# EAGLE board Initial layout (EAGLE 8.5.0)
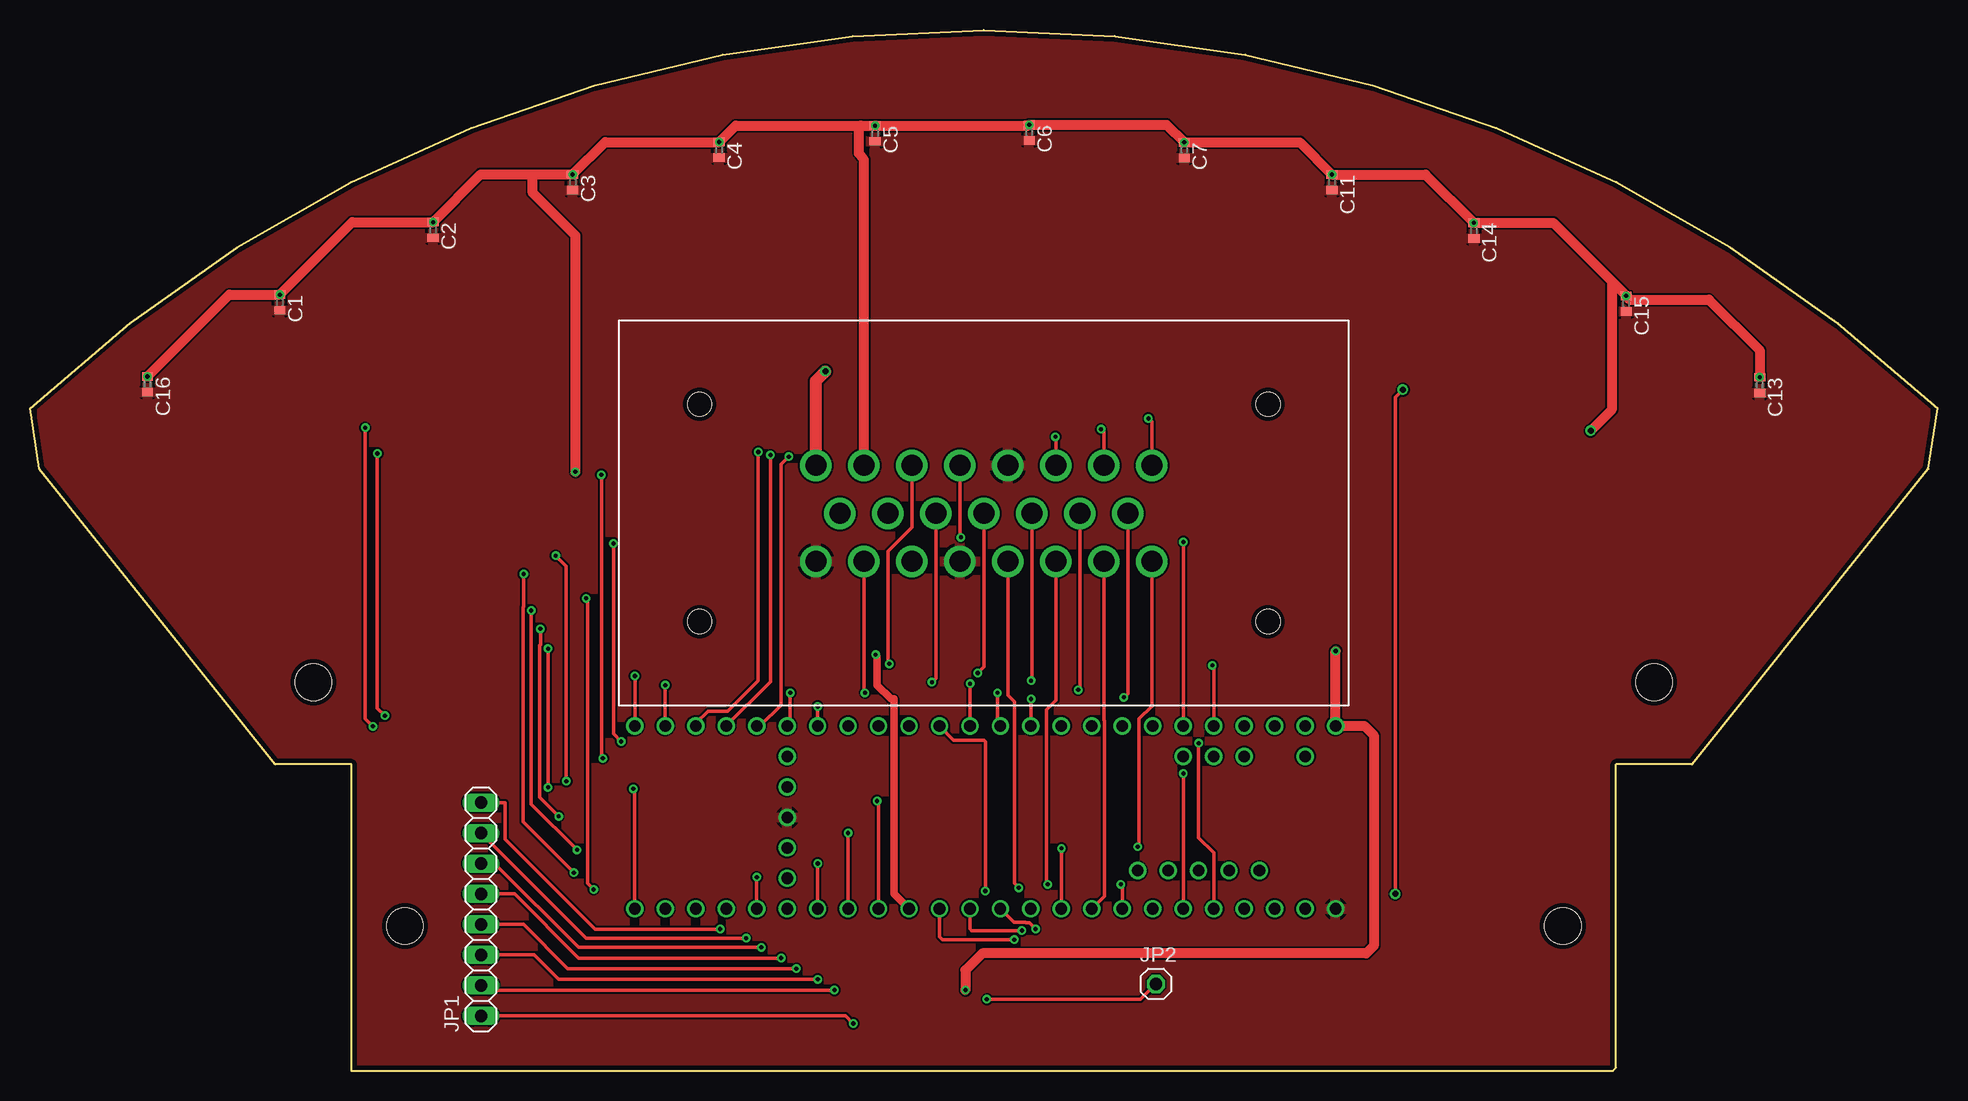
[diagram p0: board, top side]
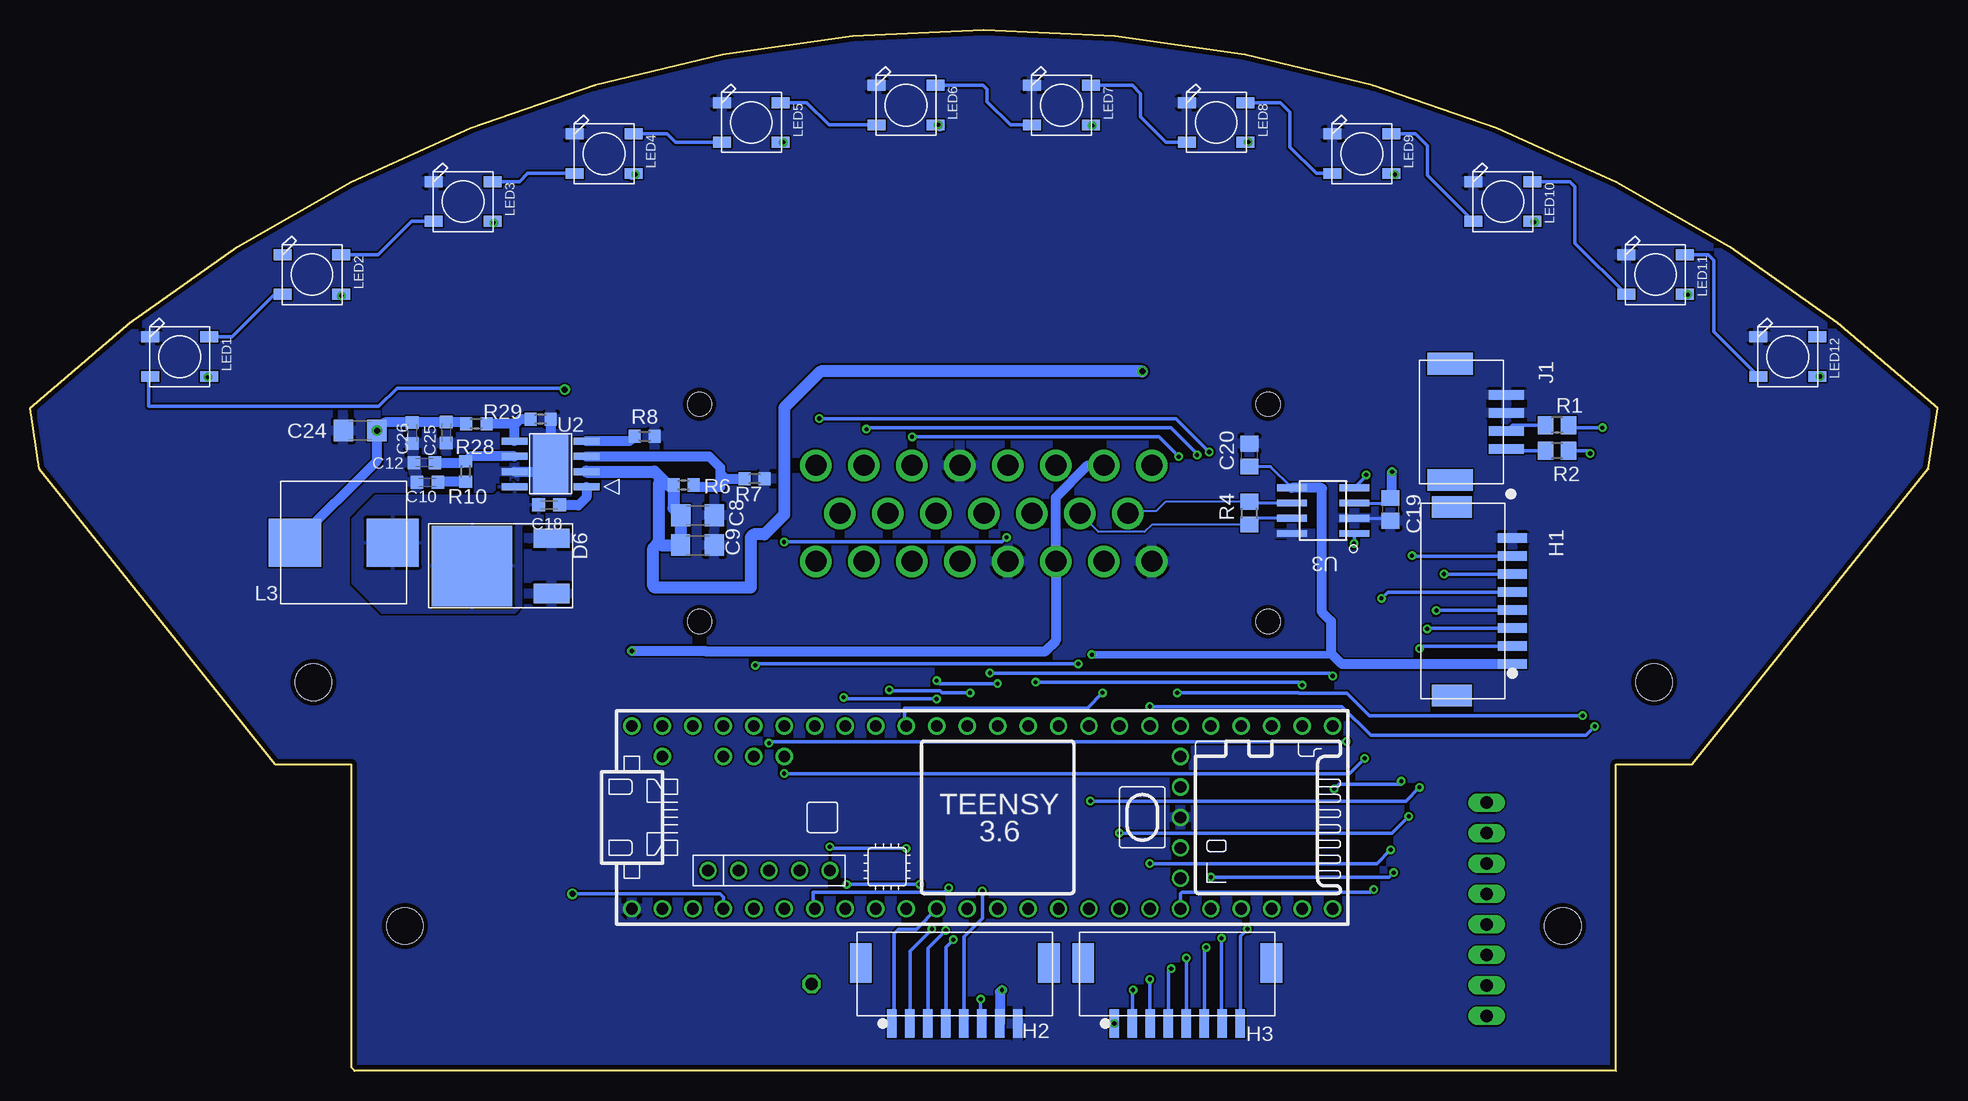
[diagram p1: board, bottom side, seen from below]

Size 159 x 86.73 mm. Coordinates in mm from the lower left corner, seen from the top.
Outline: 26.8,0 26.8,25.53 20.45,25.53 0.76,50.16 0,55.19 arc-87 159,55.19 158.24,50.16 138.56,25.53 132.21,25.53 132.21,0.25 131.95,0 26.8,0
Copper layers (1*16): Top 0.0356mm / dielectric 1.5011mm / Bottom 0.0356mm
Design rules "OSH_PCB Rules": minimum track width 6mil, minimum drill 13mil, track to track 6mil, track to pad 6mil, pad to pad 6mil, via to via 6mil, smd to smd 6mil, copper to edge 15mil, drill to drill 6mil, minimum pad ring 7mil, minimum via ring 7mil, stop-mask expansion 3mil, vias tented up to drill 0mil, thermal gap 10mil
Holes 3.05 mm at 127.76,12.07 31.24,12.07 23.62,32.39 135.38,32.39

## Footprints (pad centres in the part's own frame; a part is rotated, then mirrored left to right if it is on the bottom)
C0402 = smd 0.7 x 0.9: 1 -0.65,0; 2 0.65,0
C1206 = smd 1.6 x 1.8: 1 -1.4,0; 2 1.4,0
C0603K = smd 1.05 x 1.08: 1 -0.875,0; 2 0.875,0
C0805 = smd 1.3 x 1.5: 1 -0.95,0; 2 0.95,0
DPAK = smd 3 x 1.6: 1 4.25,-2.3; 3 4.25,2.3 | smd 6.7 x 6.7: 2 -2.4,0
MOLEX-CLIKMATE-8-VERTICAL-HEADER = smd 0.8 x 2.4: 1 5.25,4.064; 2 3.75,4.064; 3 2.25,4.064; 4 0.75,4.064; 5 -0.75,4.064; 6 -2.25,4.064; 7 -3.75,4.064; 8 -5.25,4.064 | smd 1.8 x 3.3: M1 7.85,-0.986; M2 -7.85,-0.986
MOLEX-CLIKMATE-4-R/A = smd 0.8 x 2.9: 1 2.25,3.7; 2 0.75,3.7; 3 -0.75,3.7; 4 -2.25,3.7 | smd 1.8 x 3.8: M1 4.85,-1; M2 -4.85,-1
1X08 = drill 1.016 long: 1 -8.89,0; 2 -6.35,0; 3 -3.81,0; 4 -1.27,0; 5 1.27,0; 6 3.81,0; 7 6.35,0; 8 8.89,0
1X01 = drill 1.016 octagon: 1 0,0
WURTH-744325XXXX = smd 4.35 x 4: P$1 -4.075,0; P$2 4.075,0
WS2812B = smd 1.5 x 0.9: 1-VDD 2.45,-1.65; 2-DOUT 2.45,1.65; 3-GND -2.45,1.65; 4-DIN -2.45,-1.65
R0805 = smd 1.3 x 1.5: 1 -0.95,0; 2 0.95,0
R0603 = smd 1 x 1.1: 1 -0.85,0; 2 0.85,0
TPS54540 = smd 0.6 x 2.15: 1 -1.905,-3; 2 -0.635,-3; 3 0.635,-3; 4 1.905,-3; 5 1.905,3; 6 0.635,3; 7 -0.635,3; 8 -1.905,3 | smd 3.1 x 2.4: PAD 0,0 | smd 4.9 x 2.95: PAD1 0,0
SOIC8-N_MC = smd 2.5 x 0.559: 1 -2.6,1.905; 2 -2.6,0.635; 3 -2.6,-0.635; 4 -2.6,-1.905; 5 2.6,-1.905; 6 2.6,-0.635; 7 2.6,0.635; 8 2.6,1.905
776200-1 = drill 1.75: P$1 14,-3.96; P$2 10,-3.96; P$3 6,-3.96; P$4 2,-3.96; P$5 -2,-3.96; P$6 -6,-3.96; P$7 -10,-3.96; P$8 -14,-3.96; P$9 12,0.04; P$10 8,0.04; P$11 4,0.04; P$12 0,0.04; P$13 -4,0.04; P$14 -8,0.04; P$15 -12,0.04; P$16 14,4.04; P$17 10,4.04; P$18 6,4.04; P$19 2,4.04; P$20 -2,4.04; P$21 -6,4.04; P$22 -10,4.04; P$23 -14,4.04 | hole 2: -23.7,9.05; -23.7,-9.05; 23.7,9.05; 23.7,-9.05
TEENSY_3.5/3.6 = drill 0.965: 0/RX -25.4,-7.62; 1/TX -22.86,-7.62; 2 -20.32,-7.62; 3/CANTX -17.78,-7.62; 3V3 7.62,-7.62; 3V3_2 17.78,-2.54; 3V3_LO -22.86,7.62; 4/CANRX -15.24,-7.62; 5 -12.7,-7.62; 6 -10.16,-7.62; 7 -7.62,-7.62; 8 -5.08,-7.62; 9/CS -2.54,-7.62; 10/CS 0,-7.62; 11/MOSI 2.54,-7.62; 12/MISO 5.08,-7.62; 13/SCK 5.08,7.62; 14/A0 2.54,7.62; 15/A1 0,7.62; 16/A2 -2.54,7.62; 17/A3 -5.08,7.62; 18/A4/SDA -7.62,7.62; 19/A5/SCL -10.16,7.62; 20/A6 -12.7,7.62; 21/A7 -15.24,7.62; 21/DAC0 12.7,7.62; 22/A8 -17.78,7.62; 23/A9 -20.32,7.62; 24 10.16,-7.62; 25 12.7,-7.62; 26 15.24,-7.62; 27 17.78,-7.62; 28 20.32,-7.62; 29 22.86,-7.62; 30 25.4,-7.62; 31/A12 27.94,-7.62; 32/A13 30.48,-7.62; 33/A14 30.48,7.62; 34/A15 27.94,7.62; 35/A16 25.4,7.62; 36/A17 22.86,7.62; 37/A18 20.32,7.62; 38/A19 17.78,7.62; 39/A20 15.24,7.62; A10 -17.78,5.08; A11 -15.24,5.08; A22/DAC1 10.16,7.62; AGND -25.4,7.62; AREF -20.32,5.08; GND -27.94,-7.62; GND2 7.62,7.62; GND3 17.78,0; PROG 17.78,2.54; RESET 17.78,5.08; U5V -21.59,-4.445; UD+ -16.51,-4.445; UD- -19.05,-4.445; UGND1 -13.97,-4.445; UGND2 -11.43,-4.445; VBAT 17.78,-5.08; VIN -27.94,7.62; VUSB -25.4,5.08

## Placement (x,y rotation side)
C1  [C0402]  20.83,64.02 270 top
C2  [C0402]  33.6,70.07 270 top
C3  [C0402]  45.24,74.04 270 top
C4  [C0402]  57.45,76.74 270 top
C5  [C0402]  70.45,78.11 270 top
C6  [C0402]  83.29,78.18 270 top
C7  [C0402]  96.21,76.72 270 top
C8  4.7uF 50v  [C1206]  103.36,46.29 0 bottom
C9  4.7uF 50v  [C1206]  103.37,43.8 0 bottom
C10  0.012uF  [C0603K]  125.88,49.03 180 bottom
C11  [C0402]  108.53,74.04 270 top
C12  9pF  [C0603K]  126.13,50.68 180 bottom
C13  [C0402]  144.18,57.15 270 top
C14  [C0402]  120.35,70.01 270 top
C15  [C0402]  133.05,63.93 270 top
C16  [C0402]  9.8,57.21 270 top
C18  0.1uF  [C0603K]  115.74,47.15 180 bottom
C19  .1uF  [C0805]  45.6,46.79 270 bottom
C20  .1uF  [C0805]  57.36,51.31 90 bottom
C24  47uF  [C1206]  131.48,53.35 180 bottom
C25  10uF  [C0603K]  124.31,53.17 270 bottom
C26  10uF  [C0603K]  127.13,53.16 270 bottom
D6  50WQ10FNPBF  [DPAK]  119.76,42.07 0 bottom
H1  5025840870  [MOLEX-CLIKMATE-8-VERTICAL-HEADER]  39.5,39.14 270 bottom
H2  5025840870  [MOLEX-CLIKMATE-8-VERTICAL-HEADER]  81.91,8 180 bottom
H3  5025840870  [MOLEX-CLIKMATE-8-VERTICAL-HEADER]  63.37,8 180 bottom
J1  502585-0470  [MOLEX-CLIKMATE-4-R/A]  39.63,54.07 270 bottom
JP1  [1X08]  37.59,13.46 90 top
JP2  [1X01]  93.85,7.24 0 top
L3  10uH  [WURTH-744325XXXX]  132.85,44.02 180 bottom
LED1  WS2812B5050  [WS2812B]  146.52,59.51 0 bottom
LED2  WS2812B5050  [WS2812B]  135.5,66.35 0 bottom
LED3  WS2812B5050  [WS2812B]  122.9,72.44 0 bottom
LED4  WS2812B5050  [WS2812B]  111.15,76.42 0 bottom
LED5  WS2812B5050  [WS2812B]  98.88,79.03 0 bottom
LED6  WS2812B5050  [WS2812B]  85.99,80.46 0 bottom
LED7  WS2812B5050  [WS2812B]  73.02,80.46 0 bottom
LED8  WS2812B5050  [WS2812B]  60.13,79.03 0 bottom
LED9  WS2812B5050  [WS2812B]  47.98,76.42 0 bottom
LED10  WS2812B5050  [WS2812B]  36.23,72.44 0 bottom
LED11  WS2812B5050  [WS2812B]  23.51,66.35 0 bottom
LED12  WS2812B5050  [WS2812B]  12.49,59.51 0 bottom
R1  100  [R0805]  31.71,53.81 180 bottom
R2  100  [R0805]  31.71,51.66 180 bottom
R4  120  [R0805]  57.36,46.47 90 bottom
R6  DNP  [R0603]  104.52,48.81 180 bottom
R7  DNP  [R0603]  98.61,49.35 180 bottom
R8  162k  [R0603]  107.77,52.87 180 bottom
R10  15k  [R0603]  122.69,49.95 90 bottom
R28  60.4k  [R0603]  121.81,53.92 180 bottom
R29  11.5k  [R0603]  116.44,54.3 180 bottom
U2  TPS54540DDARQ1  [TPS54540]  115.61,50.57 90 bottom
U3  [SOIC8-N_MC]  51.23,46.68 180 bottom
U$1  TE-776200-1  [776200-1]  79.5,46.48 180 top
U$2  TEENSY_3.5/3.6  [TEENSY_3.5/3.6]  80.89,21.12 0 bottom

## Library data of the parts
C1-C7 C11 C13-C16 C19 C20 R1 R2 R4 = rcl
C8 C9 = rcl; PARTNO: GRM31CR71H475KA12L
C10 = rcl; PARTNO: GRM188R71H123KA01D
C12 = rcl; PARTNO: GRM1885C1H9R0DA01D
C18 = rcl; PARTNO: GRM188R71E104KA01D
C24 = rcl; PARTNO: GRM31CR61A476ME15L
C25 C26 = rcl; PARTNO: GRM188R61A106KE69D
D6 = FormE; PARTNO: VS-50WQ10FNPBF
H1-H3 J1 U3 U$1 = FormE
JP1 JP2 = pinhead
L3 = FormE; PARTNO: 7443251000
LED1-LED12 = adafruit
R6 R7 = rcl; PARTNO: *
R8 = rcl; PARTNO: ERJ-3EKF1623V
R10 = rcl; PARTNO: ERJ-3EKF1502V
R28 = rcl; PARTNO: ERJ-3EKF6042V
R29 = rcl; PARTNO: ERJ-3EKF1152V
U2 = FormE; PARTNO: TPS54540DDAR
U$2 = Teensy356

## Nets
5VREG_EN: R6.1 R7.2 U2.3
+3V3: C20.1 H1.1 U3.5 U$2.3V3
+5V: C1.1 C2.1 C3.1 C4.1 C5.1 C6.1 C7.1 C11.1 C13.1 C14.1 C15.1 C16.1 C19.1 C24.1 C25.1 C26.1 H2.7 L3.P$2 LED1.1-VDD LED2.1-VDD LED3.1-VDD LED4.1-VDD LED5.1-VDD LED6.1-VDD LED7.1-VDD LED8.1-VDD LED9.1-VDD LED10.1-VDD LED11.1-VDD LED12.1-VDD R28.2 U3.3 U$1.P$2 U$1.P$18 U$2.VIN
+15V: C8.1 C9.1 R6.2 U2.2 U$1.P$1
AMS: U$1.P$20 U$2.5
BOOT_5V: C18.1 U2.1
BSPD: U$1.P$22 U$2.7
CAN_N: R4.2 U3.6 U$1.P$9
CAN_P: R4.1 U3.7 U$1.P$10
CAN_RX: U3.4 U$2.4/CANRX
CAN_TX: U3.1 U$2.3/CANTX
CLK: H2.5 U$2.13/SCK
COMP_5V: C12.1 R10.2 U2.6
CS: H2.2 U$2.10/CS
D/C: H2.1 U$2.9/CS
DI1: LED1.4-DIN U$2.2
DI2: U$1.P$4 U$2.21/A7
DOWN: H1.3 U$2.25
DRS_FLAP: H1.6 U$2.28
FB_5V: R28.1 R29.2 U2.5
GND: C1.2 C2.2 C3.2 C4.2 C5.2 C6.2 C7.2 C8.2 C9.2 C10.2 C11.2 C12.2 C13.2 C14.2 C15.2 C16.2 C19.2 C20.2 C24.2 C25.2 C26.2 D6.1 D6.3 H1.8 H2.8 J1.3 J1.4 LED1.3-GND LED3.3-GND LED4.3-GND LED5.3-GND LED6.3-GND LED7.3-GND LED8.3-GND LED9.3-GND LED10.3-GND LED11.3-GND LED12.3-GND R7.1 R8.1 R29.1 U2.7 U2.PAD U2.PAD1 U3.2 U3.8 U$1.P$5 U$1.P$16 U$1.P$19 U$2.GND U$2.GND3
IMD: U$1.P$21 U$2.6
LEFT: H1.4 U$2.26
MISO: H2.4 U$2.12/MISO
MOSI: H2.3 U$2.11/MOSI
N$1: LED2.3-GND
N$2: LED1.2-DOUT LED2.4-DIN
N$3: H3.1 JP1.1
N$4: LED2.2-DOUT LED3.4-DIN
N$5: LED3.2-DOUT LED4.4-DIN
N$6: LED4.2-DOUT LED5.4-DIN
N$7: LED5.2-DOUT LED6.4-DIN
N$8: LED6.2-DOUT LED7.4-DIN
N$13: H3.2 JP1.2
N$15: H3.3 JP1.3
N$16: H3.4 JP1.4
N$17: H3.5 JP1.5
N$18: H3.6 JP1.6
N$19: H3.7 JP1.7
N$26: H3.8 JP1.8
N$27: H2.6 JP2.1
N$29: C10.1 R10.1
N$34: J1.1 R2.2
N$35: J1.2 R1.2
N$36: LED7.2-DOUT LED8.4-DIN
N$37: LED8.2-DOUT LED9.4-DIN
N$38: LED9.2-DOUT LED10.4-DIN
N$39: LED10.2-DOUT LED11.4-DIN
N$40: LED11.2-DOUT LED12.4-DIN
PADDLE: H1.7 U$2.32/A13
RIGHT: H1.5 U$2.27
RJ45_L1: R1.1 U$2.39/A20
RJ45_L2: R2.1 U$2.38/A19
RT_5V: R8.2 U2.4
SERVO_PWM: U$1.P$3 U$2.22/A8
SPARE_1: U$1.P$12 U$2.33/A14
SPARE_2: U$1.P$11 U$2.34/A15
SPARE_3: U$1.P$8 U$2.35/A16
SPARE_4: U$1.P$7 U$2.36/A17
SPARE_5: U$1.P$6 U$2.37/A18
SW_5V: C18.2 D6.2 L3.P$1 U2.8
SW_BIT0: U$1.P$13 U$2.14/A0
SW_BIT1: U$1.P$14 U$2.15/A1
SW_BIT2: U$1.P$15 U$2.16/A2
SW_BIT3: U$1.P$17 U$2.17/A3
TPS: U$1.P$23 U$2.8
UP: H1.2 U$2.24

## Tracks (layer width: path | path; a pad name or v marks a point on that pad's centre or on a via)
5VREG_EN
  Bottom 0.813: U2.3 102.38,51.2 101.47,50.29 101.47,49.78 | 101.47,49.78 101.47,48.64 103.5,48.64 R6.1 | 101.47,49.78 101.04,49.35 R7.2
+3V3  (via drill 0.35)
  Top 0.61: v70.48,34.67 70.61,34.54 70.61,32.13 71.75,30.99 72.01,30.99 72.01,14.76 U$2.3V3
  Bottom 0.254: U3.5 55.6,50.36 C20.1
  Bottom 0.61: 50.55,34.8 50.67,34.67 v70.48,34.67
  Bottom 0.813: U3.5 51.38,48.58 51.31,48.51 51.31,38.23 50.55,37.47 50.55,34.8 49.64,33.89 H1.1
+5V  (via drill 0.35, 0.5)
  Top 0.813: 69.24,78.76 69.09,78.61 69.09,76.45 69.5,75.91 U$1.P$2 | 69.24,78.76 C5.1 83.22,78.76 C6.1 94.75,78.83 C7.1 105.85,77.37 C11.1 116.32,74.69 C14.1 126.97,70.66 131.83,65.79 | 69.24,78.76 58.82,78.76 C4.1 47.94,77.39 C3.1 41.91,74.69 | 41.91,74.69 37.57,74.69 C2.1 26.87,70.72 C1.1 16.6,64.67 C16.1 | 131.83,65.79 C15.1 133.37,64.26 139.95,64.26 144.18,60.04 C13.1 | v45.47,49.91 45.47,69.6 41.91,73.15 41.91,74.69 | v108.84,34.98 v108.83,34.98 U$2.VIN 111.21,28.74 112.01,27.94 112.01,10.41 111.38,9.78 79.38,9.78 77.98,8.38 v77.98,6.73 | 131.83,65.79 131.83,55.1 C24.1
  Bottom 0.254: U3.3 46.02,47.31 C19.1
  Bottom 0.305: C13.1 144.14,57.8 LED1.1-VDD | LED2.1-VDD C15.1 | C14.1 120.35,70.69 LED3.1-VDD | LED4.1-VDD 108.61,74.77 C11.1 | C7.1 96.22,77.38 LED5.1-VDD | LED6.1-VDD 83.53,78.83 C6.1 | C5.1 70.51,78.76 LED7.1-VDD | LED8.1-VDD 57.66,77.39 C4.1 | C3.1 45.32,74.77 LED9.1-VDD | LED10.1-VDD 33.72,70.72 C2.1 | C1.1 20.86,64.7 LED11.1-VDD | LED12.1-VDD C16.1
  Bottom 0.813: U$1.P$2 70.84,50.44 73.5,47.78 U$1.P$18 73.5,35.84 74.42,34.92 102.65,34.92 102.71,34.98 v108.84,34.98 | C19.1 45.47,47.87 v45.47,49.91 | R28.2 122.79,54.05 C25.1 124.32,54.03 C26.1 129.4,54.03 C24.1 130.08,50.85 L3.P$2 | 83.16,78.7 C6.1 | 108.84,74.63 LED4.1-VDD | v77.98,6.73 78.16,6.54 H2.7
  other vias: 144.18,57.8 133.05,64.58 120.35,70.66 108.53,74.69 96.21,77.37 83.29,78.83 70.45,78.76 57.45,77.39 45.24,74.69 33.6,70.72 20.83,64.67 9.8,57.86 130.08,53.35
+15V  (via drill 0.5)
  Top 1.016: U$1.P$1 65.5,57.5 v66.29,58.29
  Bottom 1.016: U2.2 106.95,49.93 106.3,49.28 | 106.3,49.28 105.83,48.81 R6.2 105.37,46.9 C8.1 C9.1 106.41,43.8 106.55,43.94 106.55,44.07 | 106.55,44.07 106.55,49.02 106.3,49.28 | v66.29,58.29 93.09,58.29 96.14,55.24 96.14,46.35 97.79,44.7 98.68,44.7 98.93,44.45 98.93,40.26 106.93,40.26 107.06,40.39 107.06,43.56 106.55,44.07
AMS  (via drill 0.35)
  Top 0.305: U$1.P$20 81.5,31.27 82.04,30.73 82.04,15.62 v82.42,15.24
  Bottom 0.305: v82.42,15.24 82.8,14.86 93.73,14.86 93.73,13.64 U$2.5
BOOT_5V
  Bottom 0.813: U2.1 112.61,47.79 113.28,47.12 114.82,47.12 C18.1
BSPD
  Top 0.305: U$1.P$22 89.5,29.22 89.55,29.17 89.55,14.54 U$2.7
CAN_N
  Bottom 0.152: R4.2 64.37,47.42 65.15,46.63 67.31,46.63 U$1.P$9
  Bottom 0.254: U3.6 57.25,47.31 R4.2
CAN_P
  Bottom 0.152: U$1.P$10 69.96,44.9 66.1,44.9 65.48,45.52 R4.1
  Bottom 0.254: U3.7 56.83,46.04 R4.1
CAN_RX  (via drill 0.35)
  Top 0.305: v47.62,49.66 47.62,26.16 v47.75,26.04 | v96.14,24.76 U$2.4/CANRX
  Bottom 0.305: U3.4 47.62,49.58 v47.62,49.66 | v47.75,26.04 49.02,24.76 v96.14,24.76
CAN_TX  (via drill 0.35)
  Top 0.305: v48.64,43.94 48.64,28.07 v49.28,27.43 | v97.41,27.3 97.41,19.43 98.68,18.16 U$2.3/CANTX
  Bottom 0.305: U3.1 48.63,43.96 v48.64,43.94 | v49.28,27.43 97.28,27.43 v97.41,27.3
CLK  (via drill 0.35)
  Top 0.305: v79.63,14.99 79.63,27.43 79.5,27.56 76.99,27.56 U$2.13/SCK
  Bottom 0.305: H2.5 81.16,11.16 79.63,12.7 v79.63,14.99
COMP_5V
  Bottom 0.813: C12.1 122.81,50.68 R10.2 122.29,51.2 U2.6
CS  (via drill 0.35)
  Top 0.305: U$2.10/CS 82.02,12.37 82.96,12.37 83.01,12.32 83.31,12.32 v83.82,11.81
  Bottom 0.305: v83.82,11.81 85.66,9.97 H2.2
D/C
  Bottom 0.305: H2.1 86.99,4.11 86.99,11.43 86.61,11.81 85.12,11.81 U$2.9/CS
DI1  (via drill 0.5)
  Top 0.305: v113.79,14.73 113.79,56.13 v114.43,56.77
  Bottom 0.305: U$2.2 101.21,14.47 101.47,14.73 v113.79,14.73 | v114.43,56.77 114.55,56.9 128.4,56.9 129.92,55.37 149.1,55.37 149.1,57.73 LED1.4-DIN
DI2  (via drill 0.35)
  Top 0.305: U$1.P$4 77.5,44.55 v77.6,44.45 | v96.14,44.07 U$2.21/A7
  Bottom 0.305: v77.6,44.45 77.98,44.07 v96.14,44.07
DOWN  (via drill 0.35)
  Top 0.305: v68.2,19.81 U$2.25 | v42.54,36.83 42.54,35.51 42.5,35.46 42.5,22.78 v44.07,21.21
  Bottom 0.305: v44.07,21.21 45.47,19.81 v68.2,19.81 | H1.3 42.49,36.89 v42.54,36.83
DRS_FLAP  (via drill 0.35)
  Top 0.305: v60.58,16.13 U$2.28 | v41.15,41.4 41.15,38.69 41.1,38.64 41.1,20.75 v45.34,16.51
  Bottom 0.305: v45.34,16.51 45.72,16.13 v60.58,16.13 | v41.15,41.4 41.13,41.39 H1.6
FB_5V
  Bottom 0.813: U2.5 118.62,53.85 | 118.62,53.85 118.69,53.92 R28.1 | R29.2 118.17,54.3 118.62,53.85
GND
  Bottom 0.254: U3.2 45.8,46.04 C19.2
  Bottom 0.813: R29.1 115.61,54.28 U2.PAD1 116.25,49.93 U2.7
  pour Top (rank 6): -5.72,90.17 164.59,90.3 165.1,-5.59 -5.21,-5.71
  pour Bottom (rank 6): -3.05,87.76 161.42,87.88 162.05,-3.68 -2.41,-3.81
IMD  (via drill 0.35)
  Top 0.305: U$1.P$21 85.5,30.89 84.71,30.1 84.71,15.67 v84.84,15.54 | v90.93,15.54 91.05,15.42 U$2.6
  Bottom 0.305: v84.84,15.54 v90.93,15.54
LEFT  (via drill 0.35)
  Top 0.305: v65.66,17.27 U$2.26 | v45.59,18.41 41.78,22.22 v41.78,38.35
  Bottom 0.305: v45.59,18.41 46.74,17.27 v65.66,17.27 | v41.78,38.35 41.75,38.39 H1.4
MISO  (via drill 0.35)
  Top 0.305: v82.04,10.92 76.07,10.92 75.81,11.18 U$2.12/MISO
  Bottom 0.305: H2.4 82.66,10.3 v82.04,10.92
MOSI  (via drill 0.35)
  Top 0.305: U$2.11/MOSI 78.35,11.82 78.49,11.68 v82.68,11.68
  Bottom 0.305: H2.3 84.16,10.2 v82.68,11.68
N$2
  Bottom 0.305: LED2.4-DIN 138.62,64.7 142.16,61.16 LED1.2-DOUT
N$3  (via drill 0.35)
  Top 0.305: JP1.1 67.99,4.57 H3.1
  other vias: 68.62,3.94
N$4
  Bottom 0.305: LED3.4-DIN 127.21,70.79 129.99,68 LED2.2-DOUT
N$5
  Bottom 0.305: LED4.4-DIN 117.5,74.77 118.19,74.09 LED3.2-DOUT
N$6
  Bottom 0.305: LED5.4-DIN 105.19,77.38 105.89,78.07 LED4.2-DOUT
N$7
  Bottom 0.305: LED6.4-DIN 92.4,78.81 94.27,80.68 LED5.2-DOUT
N$8
  Bottom 0.305: LED7.4-DIN 77.29,78.81 79.25,80.77 79.25,81.79 79.57,82.11 LED6.2-DOUT
N$13  (via drill 0.35)
  Top 0.305: v67.06,6.73 37.97,6.73 JP1.2
  Bottom 0.305: H3.2 67.12,6.66 v67.06,6.73
N$15  (via drill 0.35)
  Top 0.305: JP1.3 42.04,9.65 44.07,7.62 51.43,7.62 v65.66,7.62
  Bottom 0.305: v65.66,7.62 65.66,3.97 H3.3
N$16  (via drill 0.35)
  Top 0.305: v63.88,8.51 44.83,8.51 41.15,12.19 JP1.4
  Bottom 0.305: H3.4 64.12,8.27 v63.88,8.51
N$17  (via drill 0.35)
  Top 0.305: JP1.5 40.39,14.73 45.72,9.4 v62.61,9.4
  Bottom 0.305: v62.61,9.4 v62.62,9.39 H3.5
N$18  (via drill 0.35)
  Top 0.305: v60.96,10.29 45.72,10.29 38.73,17.27 JP1.6
  Bottom 0.305: H3.6 61.12,10.12 v60.96,10.29
N$19  (via drill 0.35)
  Top 0.305: JP1.7 46.35,11.05 v59.69,11.05
  Bottom 0.305: v59.69,11.05 59.69,4 H3.7
N$26  (via drill 0.35)
  Top 0.305: v57.53,11.81 47.12,11.81 39.62,19.3 39.62,22.35 JP1.8
  Bottom 0.305: H3.8 58.12,11.22 v57.53,11.81
N$27  (via drill 0.35)
  Top 0.305: v79.76,5.97 92.58,5.97 JP2.1
  Bottom 0.305: H2.6 79.76,4.03 v79.76,5.97
N$29
  Bottom 0.813: R10.1 124.93,49.1 C10.1
N$34
  Bottom 0.305: R2.2 35.78,51.66 J1.1
N$35
  Bottom 0.305: R1.2 35.44,53.81 J1.2
N$36
  Bottom 0.305: LED8.4-DIN 64.3,77.38 66.42,79.5 66.42,81.41 67.13,82.11 LED7.2-DOUT
N$37
  Bottom 0.305: LED9.4-DIN 51.79,74.77 53.97,76.96 53.97,79.88 54.77,80.68 LED8.2-DOUT
N$38
  Bottom 0.305: LED10.4-DIN 42.54,74.65 42.54,77.09 43.53,78.07 LED9.2-DOUT
N$39
  Bottom 0.305: LED11.4-DIN 30.23,68.97 30.23,73.66 30.65,74.09 LED10.2-DOUT
N$40
  Bottom 0.305: LED12.4-DIN 18.67,61.6 18.67,67.56 19.11,68 LED11.2-DOUT
PADDLE  (via drill 0.35)
  Top 0.305: U$2.32/A13 50.41,23.38 v50.29,23.5 | v44.7,24.13 44.7,42.04 v43.81,42.93
  Bottom 0.305: v50.29,23.5 49.91,23.88 44.7,23.88 v44.7,24.13 | v43.81,42.93 43.78,42.89 H1.7
RIGHT  (via drill 0.35)
  Top 0.305: v46.99,15.11 46.48,15.62 46.48,39.24 v46.35,39.37
  Bottom 0.305: v46.99,15.11 47.24,14.86 62.99,14.86 63.11,14.74 U$2.27 | H1.5 45.84,39.89 v46.35,39.37
RJ45_L1  (via drill 0.35)
  Top 0.305: v65.66,30.35 U$2.39/A20 | v27.94,53.59 27.94,29.34 v28.57,28.7
  Bottom 0.305: R1.1 30.54,53.59 v27.94,53.59 | v28.57,28.7 29.34,27.94 47.24,27.94 49.66,30.35 v65.66,30.35
RJ45_L2  (via drill 0.35)
  Top 0.305: v63.37,31.5 63.37,29 U$2.38/A19 | v29.59,29.59 28.96,30.23 v28.96,51.44
  Bottom 0.305: v63.37,31.5 53.29,31.5 53.24,31.45 49.23,31.45 47.37,29.59 v29.59,29.59 | R2.1 29.18,51.66 v28.96,51.44
RT_5V
  Bottom 0.813: R8.2 109.03,52.47 U2.4
SERVO_PWM  (via drill 0.35)
  Top 0.305: U$1.P$3 73.5,45.31 71.5,43.31 71.5,34.04 v71.63,33.91 | v98.55,33.78 98.67,33.66 U$2.22/A8
  Bottom 0.305: v71.63,33.91 98.42,33.91 v98.55,33.78
SPARE_1  (via drill 0.35)
  Top 0.305: U$1.P$12 79.5,33.66 v78.99,33.15 | v50.42,32.89 U$2.33/A14
  Bottom 0.305: v78.99,33.15 50.67,33.15 v50.42,32.89
SPARE_2  (via drill 0.35)
  Top 0.305: U$1.P$11 75.5,32.7 v75.18,32.39 | v52.96,32.13 52.95,32.12 U$2.34/A15
  Bottom 0.305: v75.18,32.39 53.21,32.39 v52.96,32.13
SPARE_3  (via drill 0.35)
  Top 0.305: U$1.P$8 93.5,54.07 v93.22,54.36 | v60.71,51.56 60.71,32.51 58.17,29.97 56.52,29.97 55.49,28.95 U$2.35/A16
  Bottom 0.305: v93.22,54.36 63.5,54.36 v60.71,51.56
SPARE_4  (via drill 0.35)
  Top 0.305: U$1.P$7 89.5,53.25 v89.28,53.47 | v61.72,51.31 61.72,32.43 U$2.36/A17
  Bottom 0.305: v89.28,53.47 89.15,53.59 63.88,53.59 61.72,51.44 v61.72,51.31
SPARE_5  (via drill 0.35)
  Top 0.305: U$1.P$6 85.5,52.8 v85.47,52.83 | v63.25,51.18 62.61,50.55 62.61,30.48 60.87,28.74 U$2.37/A18
  Bottom 0.305: v85.47,52.83 64.9,52.83 v63.25,51.18
SW_5V
  pour Bottom: 118.75,49.02 117.6,47.88 117.35,47.62 116.33,47.62 116.33,45.85 116.59,45.59 118.11,45.59 118.11,38.73 118.62,38.23 129.67,38.23 132.08,40.64 132.08,45.97 131.19,46.86 130.18,47.88 120.27,47.88 119.89,48.26 119.89,49.15 118.87,49.15
SW_BIT0  (via drill 0.35)
  Top 0.305: U$1.P$13 83.5,32.58 v83.44,32.51 | v78.36,32.26 U$2.14/A0
  Bottom 0.305: v83.44,32.51 83.19,32.26 v78.36,32.26
SW_BIT1  (via drill 0.35)
  Top 0.305: U$1.P$14 87.5,31.88 v87.38,31.75 | v80.64,31.5 80.64,28.99 U$2.15/A1
  Bottom 0.305: v80.64,31.5 82.98,31.5 83.16,31.67 87.3,31.67 v87.38,31.75
SW_BIT2  (via drill 0.35)
  Top 0.305: U$1.P$15 91.5,31.43 v91.19,31.11 | v83.44,30.99 83.43,30.98 U$2.16/A2
  Bottom 0.305: v91.19,31.11 91.06,30.99 v83.44,30.99
SW_BIT3  (via drill 0.35)
  Top 0.305: U$1.P$17 69.5,31.59 v69.6,31.5
  Bottom 0.305: v69.6,31.5 70.87,30.23 86.11,30.23 86.11,28.88 U$2.17/A3
TPS  (via drill 0.35)
  Top 0.305: U$1.P$23 93.5,30.38 92.46,29.34 92.46,18.8 v92.33,18.67 | v85.98,18.54 v85.97,18.53 U$2.8
  Bottom 0.305: v92.33,18.67 92.2,18.54 v85.98,18.54
UP  (via drill 0.35)
  Top 0.305: v70.61,22.48 70.73,22.36 U$2.24 | v43.18,35.18 v43.18,23.62
  Bottom 0.305: v43.18,23.62 44.32,22.48 v70.61,22.48 | H1.2 42.97,35.39 v43.18,35.18